# Altium PCB vaSmd-V3.PcbDoc
Units mm, origin at the board's own origin, x right, y up, seen from the top; angles counter-clockwise.
Board outline 80.58 x 36.53 mm, 2 copper layers (Top Layer, Bottom Layer); 34 components, 28 nets, 129 pads, 28 vias.
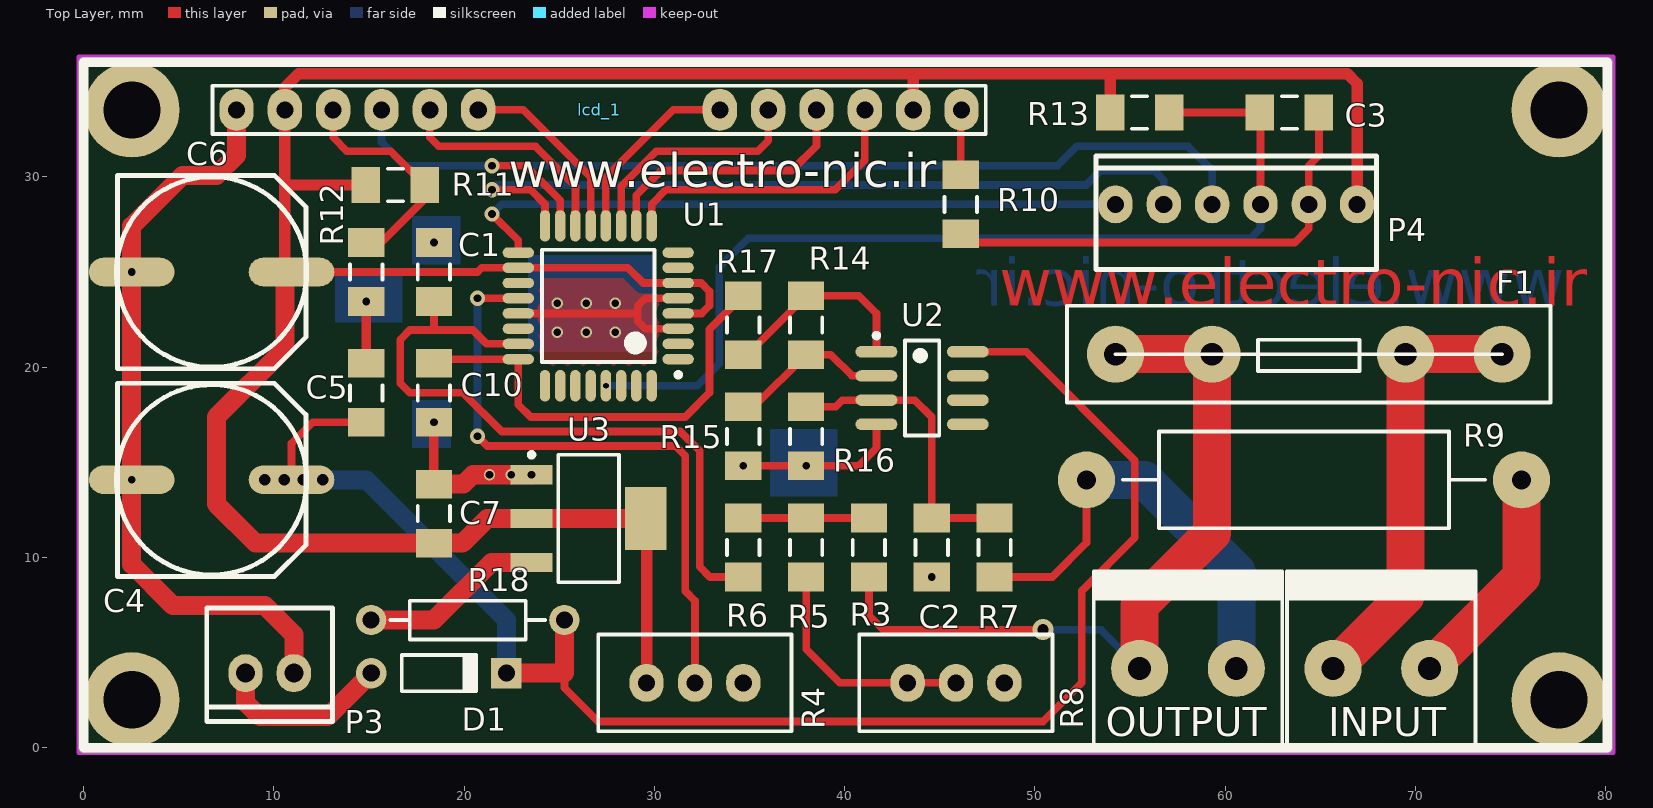
[diagram p0: Top Layer view]
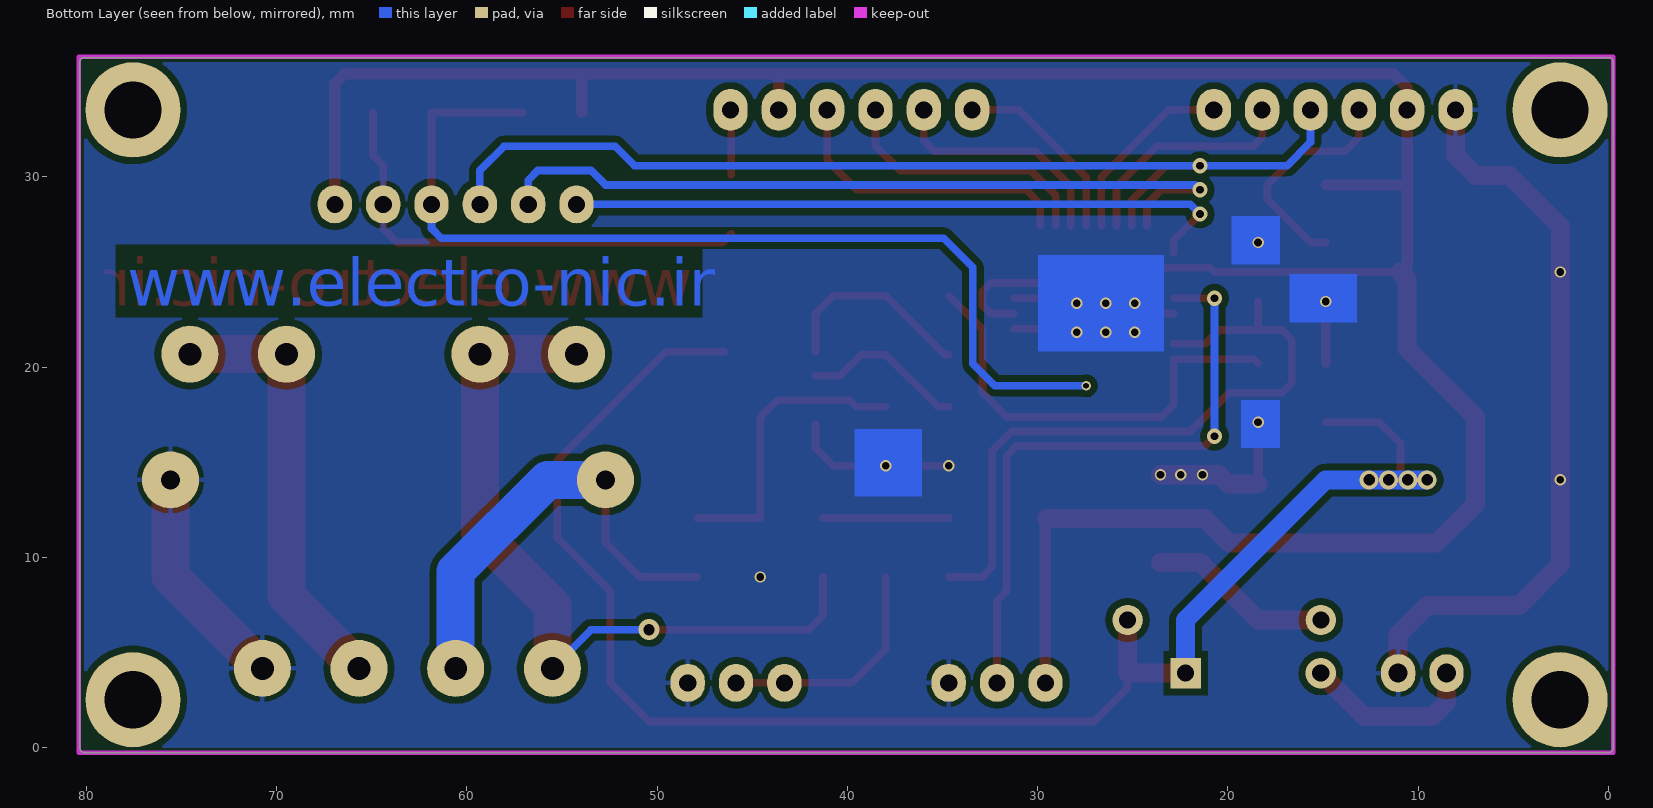
[diagram p1: Bottom Layer view, seen from below]
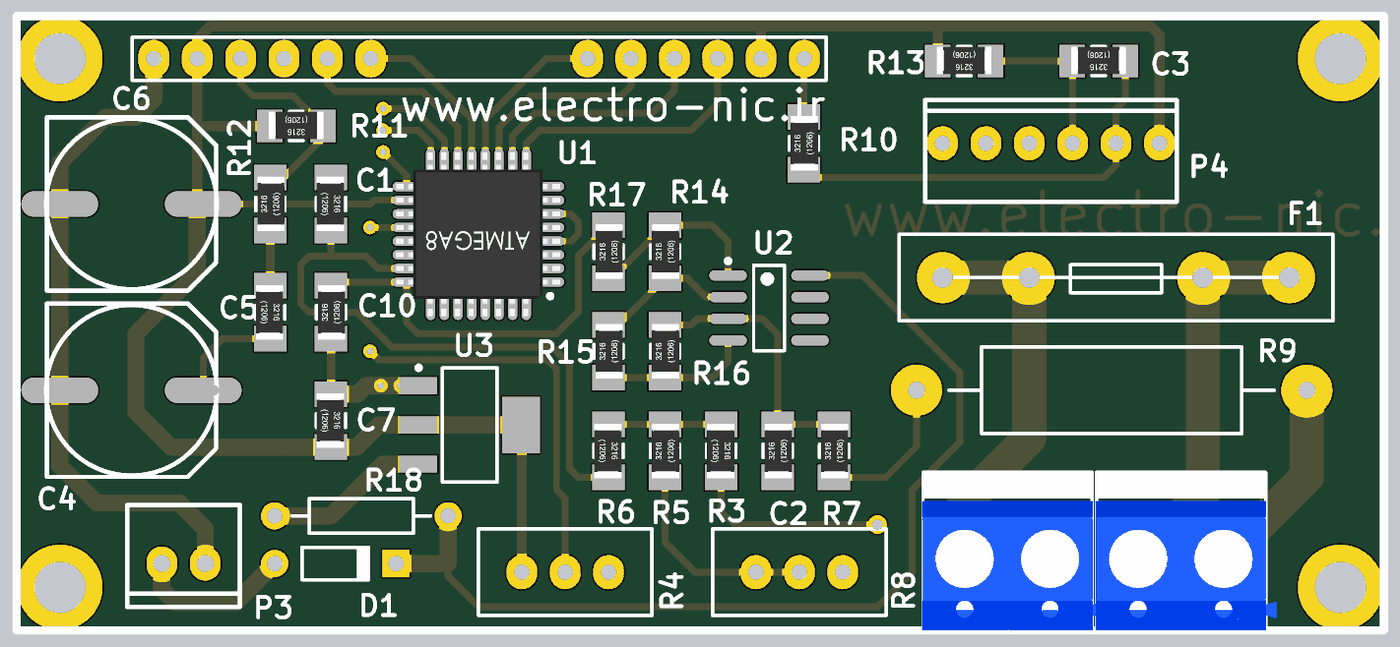
[diagram p2: 3D render of the assembled board from above, using the file's embedded part models]

## Layer stack, top to bottom
Top Solder: solder mask 0.0102, Solder Resist, Dk 3.5
Top Layer: signal copper 0.0356
Dielectric1: dielectric 0.32, FR-4, Dk 4.8
Bottom Layer: signal copper 0.0356
Bottom Solder: solder mask 0.0102, Solder Resist, Dk 3.5

## Board outline
-0.25,0.014 cw(c0,0.028) -0.25,0.028 -0.25,36.028 cw(c0,36.028) 0,36.278 80.08,36.278 cw(c80.08,36.028) 80.33,36.028 80.33,0 cw(c80.08,0) 80.08,-0.25 0,-0.25 cw(c0,0)

## Design rules (kind name [scope] priority, off if disabled: settings)
Clearance [All] p1: gap=0.35
FabricationTestPointUsage TestPointUsage [All] p1: valid=0 allowmultiple=FALSE
FabricationTestpoint Testpoint [(IsPad And (OnTopLayer Or OnBottomLayer))] p1: side=3 testpointundercomponent=TRUE minsize=1.016 maxsize=2.54 preferedsize=1.524 minholesize=0 maxholesize=1.016 preferedholesize=0.813 testpointgrid=0.025 allowsidetop=TRUE allowsidebottom=TRUE usegrid=TRUE gridtolerance=0
PolygonConnect [All] p1: connectstyle=Relief reliefconductorwidth=0.254 reliefentries=4 polygonreliefangle="90 Angle" airgapwidth=0.254
RoutingVias [All] p1: holewidth=0.711 width=1.27 viastyle="Through Hole" minholewidth=0.711 minwidth=1.27 maxholewidth=0.711 maxwidth=1.27
SolderMaskExpansion [All] p1: expansion=0.102
Width [All] p1: maxlimit=5 minlimit=0.254 preferedwidth=0.254 minimp=50.000000 maximp=50.000000 favimp=50.000000
28 further rules are at their usual default settings.

## Components (designator, comment, footprint, x,y, rotation, side; value= is the part's Value field where it differs from the comment)
C1 "" RESC3216m 18.415,25.007 r270 top
C2 "" RESC3216m 44.577,10.529 r90 top
C3 "" RESC3216m 63.373,33.389 r180 top
C4 "" cap_smd_10*10.5 6.731,14.085 r0 top
C5 "" RESC3216m 14.859,18.657 r270 top
C6 "" cap_smd_10*10.5 6.731,25.007 r0 top
C7 "" RESC3216m 18.415,12.307 r270 top
C10 "" RESC3216m 18.415,18.657 r90 top
D1 "" DO-35 18.669,3.925 r0 top
F1 "" fuse1 64.389,20.689 r0 top
INPUT "" terminal_2pin 70.739,4.179 r0 top
lcd_1 "" HDR1X16 8.04,33.528 r0 top
OUTPUT "" terminal_2pin 60.579,4.179 r0 top
P3 "" Mokhaberati_2pin 11.049,3.925 r180 top
P4 "Header 6" Mokhaberati_6pin 54.229,28.563 r0 top
R3 "" RESC3216m 41.275,10.529 r270 top
R4 "" VR5 32.131,3.417 r180 top
R5 "" RESC3216m 37.973,10.529 r90 top
R6 "" RESC3216m 34.671,10.529 r270 top
R7 "" RESC3216m 47.879,10.529 r90 top
R8 "" VR5 45.847,3.417 r180 top
R9 "" AXIAL-0.9 64.135,14.085 r180 top
R10 "" RESC3216m 46.101,28.563 r90 top
R11 "" RESC3216m 16.383,29.579 r180 top
R12 "" RESC3216m 14.859,25.007 r90 top
R13 "" RESC3216m 55.499,33.389 r180 top
R14 "" RESC3216m 37.973,22.213 r90 top
R15 "" RESC3216m 34.671,16.371 r90 top
R16 "" RESC3216m 37.973,16.371 r90 top
R17 "" RESC3216m 34.671,22.213 r90 top
R18 "Res1" AXIAL-0.4 20.193,6.719 r0 top
U1 "" 32A_N 27.051,23.229 r180 top
U2 "LM358M" M08A_N 44.069,18.911 r0 top
U3 "HT1117-50_SOT223" SOT223_N 26.543,12.053 r0 top

## Footprints (in the part's own frame and the unit in brackets; to place one, negate y for a bottom-side part, rotate by r counter-clockwise, add the part's x,y. Pads: shape width x height; smd on the part's side, far side on the other; paste and mask are expansions set on the pad)
32A_N [mm] "Thin QFP, 32-Leads, Body 7x7mm, Pitch 0.8mm, IPC Medium Density"
  oval 1.65x0.55 smd: 1(-4.2,2.8) 2(-4.2,2) 3(-4.2,1.2) 4(-4.2,0.4) 5(-4.2,-0.4) 6(-4.2,-1.2) 7(-4.2,-2) 8(-4.2,-2.8) 17(4.2,-2.8) 18(4.2,-2) 19(4.2,-1.2) 20(4.2,-0.4) 21(4.2,0.4) 22(4.2,1.2) 23(4.2,2) 24(4.2,2.8)
  oval 0.55x1.65 smd: 9(-2.8,-4.2) 10(-2,-4.2) 11(-1.2,-4.2) 12(-0.4,-4.2) 13(0.4,-4.2) 14(1.2,-4.2) 15(2,-4.2) 16(2.8,-4.2) 25(2.8,4.2) 26(2,4.2) 27(1.2,4.2) 28(0.4,4.2) 29(-0.4,4.2) 30(-1.2,4.2) 31(-2,4.2) 32(-2.8,4.2)
  silkscreen extent -4.33,-2.95 2.95,3.75, body extent -4.77,-4.8 4.83,4.8, height 1.08
AXIAL-0.4 [mm] "Axial Device, Thru-Hole; 2 Leads; 0.4 in Pin Spacing"
  round 1.6 hole 0.9: 1(-5.08,0) 2(5.08,0)
  silkscreen extent -4.06,-1.02 4.06,1.02
AXIAL-0.9 [mm] "Axial Device, Thru-Hole; 2 Leads; 0.9 in Pin Spacing"
  round 3 hole 1: 1(-11.43,0) 2(11.43,0)
  silkscreen extent -9.53,-2.54 9.53,2.54
cap_smd_10*10.5 [mm]
  oval 4.5x1.5 smd: 1(4.2,0) 2(-4.2,0)
  silkscreen extent -5,-5.08 5,5.08
DO-35 [mm] "Diode, Axial; Body 3.8 x 1.9 mm (LxDia. max), Lead Dia. 0.53 mm (max)"
  round 1.6 hole 0.9: 1(-3.55,0)
  rect 1.6x1.6 hole 0.9: 2(3.55,0)
  silkscreen extent -1.95,-0.95 2.05,0.95
fuse1 [mm]
  round 3 hole 1.2: 1(5.08,0) 1(10.16,0) 2(-10.16,0) 2(-5.08,0)
  silkscreen extent -12.7,-2.54 12.7,2.54
HDR1X16 [mm] "Connector; Header; 16 Position"
  oval 1.8x2.2 hole 0.9: 1(0,0) 2(2.54,0) 3(5.08,0) 4(7.62,0) 5(10.16,0) 6(12.7,0) 11(25.4,0) 12(27.94,0) 13(30.48,0) 14(33.02,0) 15(35.56,0) 16(38.1,0)
  silkscreen extent -1.27,-1.27 39.37,1.27
M08A_N [mm] "SOIC, 8-Leads, Body 4.9x3.9mm, Pitch 1.27mm, IPC Medium Density"
  oval 2.2x0.6 smd: 1(-2.4,1.905) 2(-2.4,0.635) 3(-2.4,-0.635) 4(-2.4,-1.905) 5(2.4,-1.905) 6(2.4,-0.635) 7(2.4,0.635) 8(2.4,1.905)
  silkscreen extent -2.52,-2.5 0.9,2.88, body extent -2,-2.5 2,2.5, height 1.75
Mokhaberati_2pin [mm]
  oval 1.8x2 hole 1: 1(0,0) 2(2.54,0)
  silkscreen extent -2.03,-3.43 4.57,2.54
Mokhaberati_6pin [mm]
  oval 1.8x2 hole 0.9: 1(0,0) 2(2.54,0) 3(5.08,0) 4(7.62,0) 5(10.16,0) 6(12.7,0)
  silkscreen extent -1.02,-3.43 13.72,2.54
RESC3216m [mm] "Chip Resistor, Body 3.2x1.6mm, IPC Low Density"
  rect 1.5x1.9 smd: 1(-1.55,0) 2(1.55,0)
  silkscreen extent -0.4,-0.85 0.4,0.85, body extent -1.6,-0.84 1.6,0.76, height 0.53
SOT223_N [mm] "SOT223, 4-Leads, Body 6.5x3.5mm, Pitch 2.3mm, Lead Span 7mm, IPC Medium Density"
  rect 2.2x1 smd: 1(-3,2.3) 2(-3,0) 3(-3,-2.3)
  rect 2.2x3.3 smd: 4(3,0)
  silkscreen extent -3.12,-3.35 1.6,3.47, body extent -1.85,-3.35 1.85,3.35, height 1.8
terminal_2pin [mm]
  round 3 hole 1.2: 1(0,0) 2(-5.08,0)
  silkscreen extent -7.49,-4.05 2.41,5.09, body extent -7.55,-4.18 3.05,3.42, height 10
VR5 [mm] "Thru-Hole; 3 Leads"
  oval 1.8x2 hole 0.9: 1(-2.54,0) 2(0,0) 3(2.54,0)
  silkscreen extent -5.08,-2.54 5.08,2.54

## Part data
C1 C2 C3 C5 C7 C10: library part Cap, "Capacitor"
C4 C6: library part "Cap Pol1", "Polarized Capacitor (Radial)"
D1: library part "Diode 1N4148", "High Conductance Fast Diode"
F1: library part "Fuse 1", "Fuse"
INPUT OUTPUT P3: library part "Header 2", "Header, 2-Pin"
lcd_1: library part lcd-2*16
P4: "Header, 6-Pin"
R3 R5 R6 R7 R9 R10 R11 R12 R13 R14 R15 R16 R17: library part Res2, "Resistor"
R4 R8: library part RPot, "Potentiometer"
R18: "Resistor"
U1: library part ATmega8A-AU, "8-bit AVR Microcontroller, 8KB Flash, 512 Bytes EEPROM, 1KB SRAM, 32-pin TQFP, Industrial Grade (-40°C to 85°C)"
U2: "Low Power Dual Operational Amplifier, 8-pin Narrow SOIC"
U3: "5.0V, 1A General Purpose LDO"

## Free pads (board coordinates)
  round 1 hole 0.2: 4(2.54,33.528)
  round 5 hole 3: 7(2.54,33.528) 8(77.54,33.528) 9(2.54,2.528) 10(77.54,2.528)

## Via types
v1: diameter 0.6, hole 0.4, Top Layer to Bottom Layer, 17 vias
v2: diameter 0.8, hole 0.4, Top Layer to Bottom Layer, 5 vias
v3: diameter 1, hole 0.6, Top Layer to Bottom Layer, 4 vias
v4: diameter 1.1, hole 0.6, Top Layer to Bottom Layer, 1 vias
v5: diameter 0.5, hole 0.3, Top Layer to Bottom Layer, 1 vias

## Nets (pads, with @x,y where several pads share a name; then routed paths per layer and width w, separated by ;. In a path a pad name is that pad's centre, name@x,y a point inside that pad or via, vN(x,y) a via of type N, cw(c..) or ccw(c..) an arc to the next point about the centre after c; other vN are vias at no path point)
D4: lcd_1.11 U1.12 | length 10
  Top Layer w0.4: U1.12 27.451,29.979 31,33.528 lcd_1.11
D5: lcd_1.12 U1.11 | length 12.4
  Top Layer w0.4: U1.11 28.251,29.509 30.099,31.357 35.433,31.357 35.98,31.904 lcd_1.12
D6: lcd_1.13 U1.10 | length 14
  Top Layer w0.4: U1.10 29.051,29.039 30.353,30.341 37.211,30.341 38.52,31.65 lcd_1.13
D7: lcd_1.14 U1.9 | length 15.9
  Top Layer w0.4: U1.9 29.851,28.569 30.607,29.325 39.497,29.325 41.06,30.888 lcd_1.14
EN: lcd_1.6 U1.13 | length 9.9
  Top Layer w0.4: lcd_1.6 23.102,33.528 26.651,29.979 U1.13
GND: C1.1 C2.1 C3.1 C4.2 C5.1 C6.2 C7.1 C10.1 INPUT.1 lcd_1.1 P3.1 P4.5 R4.1 R8.1 R9.1 R10.1 R12.1 R15.1 R16.1 U1.3 U1.5 U1.21 U2.4 U3.1 | length 108.2
  Top Layer w0.4: U1.21 29.121,22.829 ; U1.3 29.521,22.029 29.121,22.429 29.121,23.229 29.521,23.629 U1.5 ; v1(34.671,14.821) v1(37.973,14.821) 40.741,14.821 41.669,15.749 U2.4 ; R10.1 46.559,26.555 63.652,26.555 64.389,27.293 P4.5 64.389,30.595 64.923,31.129 C3.1
  Top Layer w0.5: C5.1 v1(14.859,23.457) ; C7.1 v1(18.415,17.107)
  Top Layer w1: v1(2.531,14.085) 2.531,9.649 4.699,7.481 9.525,7.481 11.049,5.957 P3.1 ; C4.2@2.531,14.339 v1(2.531,25.007) 2.531,27.411 5.207,30.087 6.985,30.087 8.04,31.142 lcd_1.1 ; C7.1 19.965,13.857 20.461,14.353 v1(23.543,14.353)
  Top Layer w2: INPUT.1 75.565,9.005 R9.1
  other v1: 44.577,8.979 21.336,14.353 22.479,14.353 24.892,21.844 26.416,21.844 27.94,21.844 24.892,23.368 26.416,23.368 27.94,23.368 18.415,26.557
I: C10.2 R17.2 U1.24 | length 23.6
  Top Layer w0.4: C10.2 18.637,20.429 U1.24 22.851,18.031 23.495,17.387 31.623,17.387 32.893,18.657 32.893,21.985 R17.2
IN: C4.1 C5.2 D1.2 R18.2 U2.8 | length 87
  Top Layer w0.4: C4.1 10.931,15.999 12.039,17.107 C5.2 ; R18.2 25.273,3.163 27.051,1.385 50.419,1.385 52.451,3.417 52.451,8.243 55.245,11.037 55.245,15.101 49.53,20.816 U2.8
  Top Layer w1: D1.2 25.273,3.925 R18.2
  Bottom Layer w1: v3(9.525,14.085) 14.859,14.085 22.219,6.725 D1.2
  other v3: 10.541,14.085 11.557,14.085 12.573,14.085
MISO: P4.2 U1.16 | length 41.4
  Top Layer w0.4: v2(21.463,29.325) 23.495,29.325 24.251,28.569 U1.16
  Bottom Layer w0.4: v2(21.463,29.325) 21.717,29.579 52.705,29.579 53.467,30.341 56.261,30.341 56.769,29.833 P4.2
MOSI: lcd_1.4 P4.3 U1.15 | length 54.3
  Top Layer w0.4: v2(21.463,30.595) 23.241,30.595 25.051,28.785 U1.15
  Bottom Layer w0.4: lcd_1.4 15.66,31.826 16.891,30.595 v2(21.463,30.595) 51.181,30.595 52.197,31.611 58.039,31.611 59.309,30.341 P4.3
NetC2_2: C2.2 R7.2 R16.2 U2.3 | length 15.7
  Top Layer w0.4: R16.2 39.523,17.921 39.878,18.276 U2.3 43.688,18.276 44.577,17.387 C2.2 R7.2
NetD1_1: D1.1 P3.2 | length 9.4
  Top Layer w1: P3.2 8.509,2.401 9.271,1.639 12.833,1.639 D1.1
NetF1_1: F1.1 INPUT.2 | length 23.2
  Top Layer w2: INPUT.2 69.469,7.989 69.469,20.689 F1.1@74.549,20.689
NetF1_2: F1.2 OUTPUT.2 R3.2 | length 40.6
  Top Layer w0.4: R3.2 41.275,6.973 42.037,6.211 v4(50.419,6.211)
  Top Layer w2: F1.2@54.229,20.689 59.309,20.689 59.309,11.291 55.499,7.481 OUTPUT.2
  Bottom Layer w0.4: v4(50.419,6.211) 53.467,6.211 OUTPUT.2
Netlcd_1_3: lcd_1.3 R11.1 R12.2 | length 12.1
  Top Layer w0.4: lcd_1.3 13.12,32.08 13.843,31.357 16.155,31.357 R11.1 17.933,28.843 15.647,26.557 R12.2
Netlcd_1_16: lcd_1.16 R10.2 | length 3.4
  Top Layer w0.4: R10.2 46.101,33.489 lcd_1.16
NetOUTPUT_1: OUTPUT.1 R7.1 R9.2 | length 23.8
  Top Layer w0.4: R7.1 50.901,8.979 52.705,10.783 R9.2
  Bottom Layer w2: R9.2 55.753,14.085 60.579,9.259 OUTPUT.1
NetR3_1: R3.1 R5.2 R6.1 | length 6.6
  Top Layer w0.4: R6.1 R5.2 R3.1
NetR4_3: R4.2 U1.20 | length 32.9
  Top Layer w0.4: v2(20.701,16.371) 21.209,15.863 31.115,15.863 31.623,15.355 31.623,8.243 32.131,7.735 R4.2 ; v2(20.701,23.629) U1.20
  Bottom Layer w0.4: v2(20.701,16.371) v2(20.701,23.629)
NetR5_1: R5.1 R8.2 R8.3 | length 12.4
  Top Layer w0.4: R5.1 37.973,5.195 39.751,3.417 R8.3 R8.2
NetR14_1: R14.1 R15.2 U2.2 | length 8.6
  Top Layer w0.4: R15.2 35.231,17.921 R14.1 39.269,20.663 40.386,19.546 U2.2
NetR14_2: R14.2 R17.1 U2.1 | length 10.7
  Top Layer w0.4: R17.1 34.873,20.663 R14.2 40.741,23.763 41.669,22.835 U2.1
NetR18_1: R18.1 U3.3 | length 9.7
  Top Layer w1: R18.1 18.415,6.719 21.449,9.753 U3.3
RST: C3.2 P4.4 R13.1 U1.29 | length 51.7
  Top Layer w0.4: R13.1 C3.2 61.849,33.363 P4.4
  Bottom Layer w0.4: v5(27.451,19.029) 32.249,19.029 33.401,20.181 33.401,25.261 34.925,26.785 61.341,26.785 61.849,27.293 P4.4
RW: lcd_1.5 U1.14 | length 12.2
  Top Layer w0.4: lcd_1.5 18.2,32.08 18.669,31.611 23.749,31.611 25.851,29.509 U1.14
SCK: P4.1 U1.17 | length 35.6
  Top Layer w0.4: v2(21.463,28.055) 22.851,26.667 U1.17
  Bottom Layer w0.4: v2(21.463,28.055) 21.971,28.563 P4.1
V: C1.2 R6.2 U1.23 | length 36.3
  Top Layer w0.4: C1.2 18.415,21.959 ; U1.23 21.177,21.229 20.447,21.959 18.415,21.959 ; R6.2 32.919,8.979 32.385,9.513 32.385,15.609 31.369,16.625 21.971,16.625 19.939,18.657 17.145,18.657 16.637,19.165 16.637,21.451 17.145,21.959 18.415,21.959
VCC: C6.1 C7.2 lcd_1.2 lcd_1.15 P4.6 R4.3 R11.2 R13.2 U1.4 U1.6 U1.18 U3.2 U3.4 | length 152.8
  Top Layer w0.4: C6.1 20.701,25.007 20.923,25.229 U1.18 28.607,25.229 29.407,24.429 U1.6 32.455,24.429 32.893,23.991 32.893,23.229 32.493,22.829 U1.4
  Top Layer w0.6: C6.1 10.58,25.358 10.58,29.579 ; R11.2 10.58,29.579 ; U3.4 29.591,12.005 R4.3 ; lcd_1.15 43.6,35.421 ; R13.2 53.949,35.395 ; P4.6 66.929,34.913 66.421,35.421 43.6,35.421 ; 10.58,29.579 lcd_1.2 10.58,34.698 11.303,35.421 43.6,35.421
  Top Layer w1: C6.1 10.58,24.656 10.58,20.982 6.985,17.387 6.985,12.815 9.043,10.757 C7.2 19.913,10.757 21.209,12.053 U3.2 U3.4
pads on no net: U1.1 U1.2 U1.7 U1.8 U1.19 U1.22 U1.25 U1.26 U1.27 U1.28 U1.30 U1.31 U1.32 U2.5 U2.6 U2.7

## Polygon pours and split planes (outlines as drawn)
GND on Top Layer "Top Layer-No Net" (solid, remove dead copper, pour order 0): 22.225,28.055 31.877,28.055 31.877,18.403 22.225,18.403 22.225,28.055
GND on Bottom Layer "Top Layer-No Net" (solid, remove dead copper, pour order 2): 0,0 80.086,0 80.086,36.043 0,36.043

## Keep-outs
Keep-Out Layer:
  lines w0.254: -0.254,-0.254 80.391,-0.254 80.391,36.322 -0.254,36.322 -0.254,-0.254

## Other copper
Top Layer:
  text "www.electro-nic.ir" at 48.133,23.229 h2.5
Bottom Layer:
  rectangle net GND: 36.068,13.208 39.624,16.764
  rectangle net GND: 23.368,20.828 29.972,25.908
  rectangle net GND: 17.272,25.4 19.812,27.94
  rectangle net GND: 17.272,15.748 19.304,18.288
  rectangle net GND: 13.208,22.352 16.764,24.892
  text "www.electro-nic.ir" at 77.851,23.229 h2.5

## Silkscreen, mask and mechanical layers (free items; w line width, h text height)
Top Overlay:
  lines w0.5: 0,0 80.08,0 80.08,36.028 0,36.028 0,0.028
  text "www.electro-nic.ir" at 22.352,29.464 h1.8